# EAGLE board iupitter (EAGLE 7.7.0)
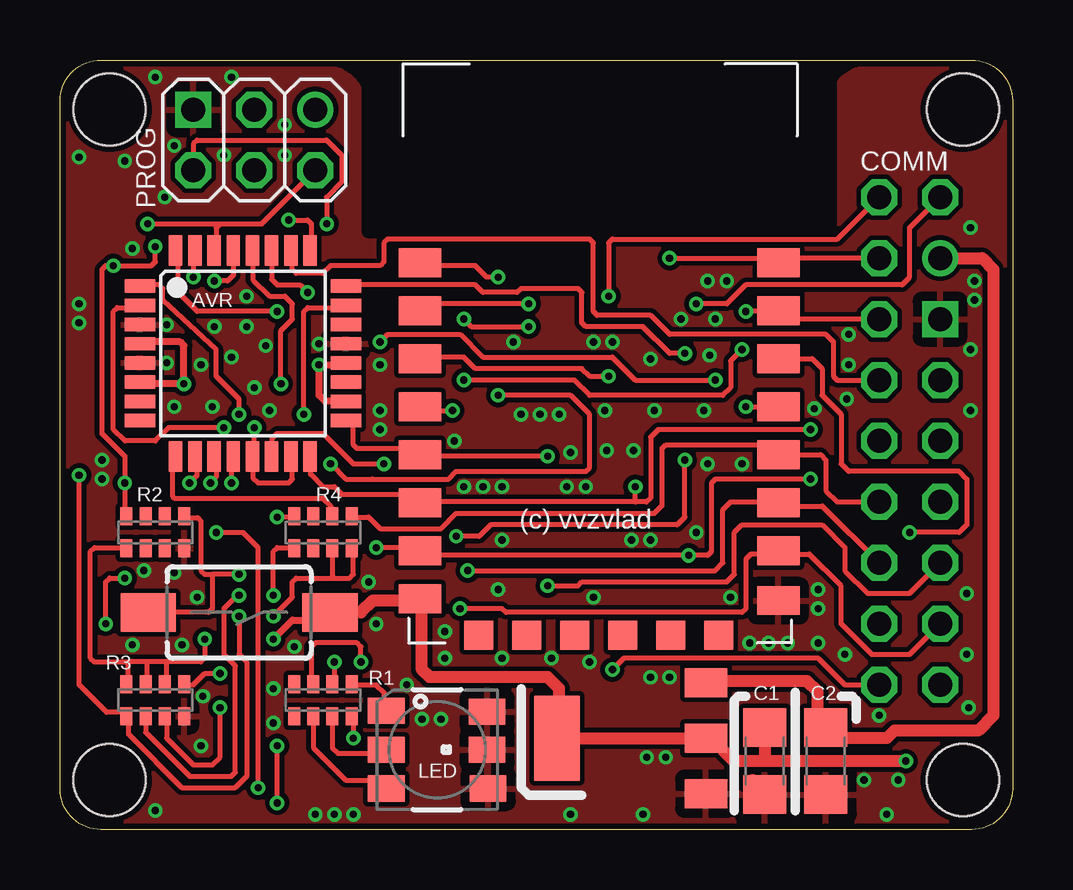
[diagram p0: board, top side]
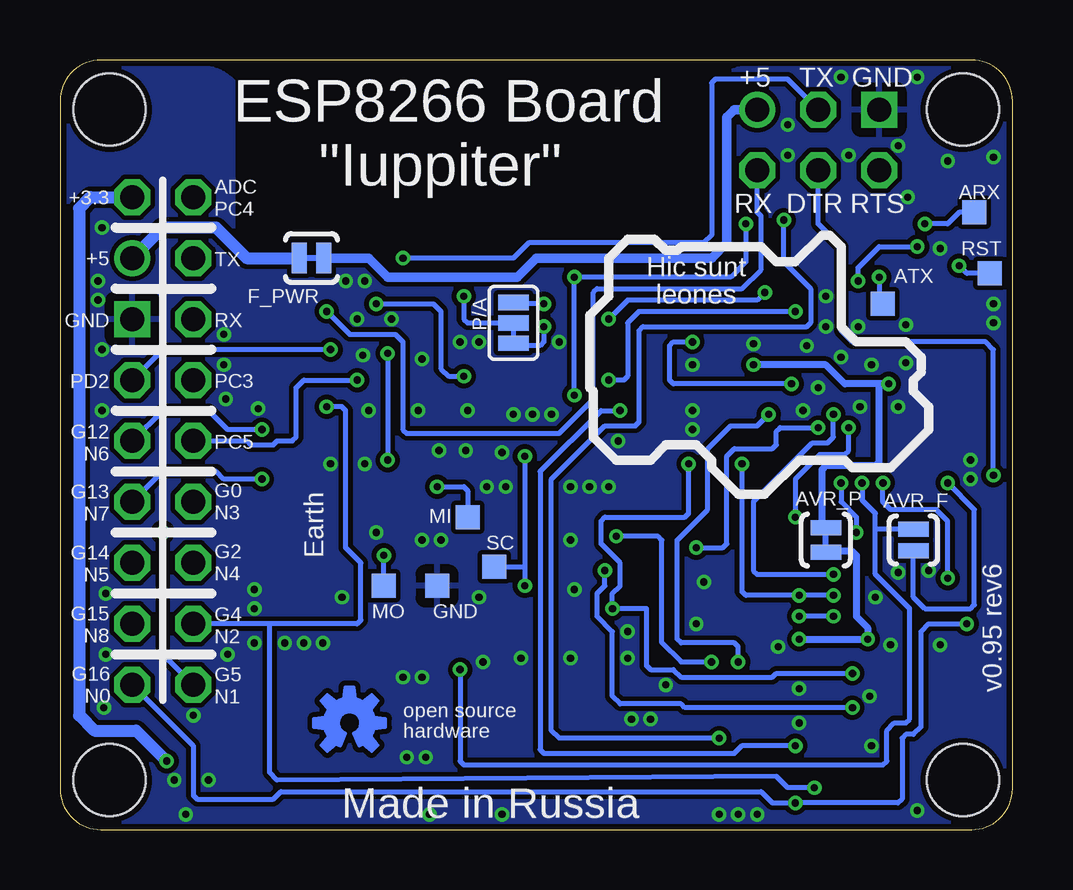
[diagram p1: board, bottom side, seen from below]

Size 39.69 x 32.07 mm. Coordinates in mm from the lower left corner, seen from the top.
Outline: 0,1.7 0,30.37 arc-90 1.7,32.07 37.99,32.07 arc-90 39.69,30.37 39.69,1.7 arc-90 37.99,0 1.7,0 arc-90 0,1.7
Copper layers (1*16): Top 0.035mm / dielectric 1.5mm / Bottom 0.035mm
Design rules "rezonit_35mm": minimum track width 0.2mm, minimum drill 0.3mm, track to track 0.2mm, track to pad 0.2mm, pad to pad 0.2mm, via to via 0.2mm, smd to smd 0.1mm, copper to edge 0.25mm, drill to drill 0.2mm, minimum pad ring 0.2mm, minimum via ring 0.15mm, stop-mask expansion 0.05mm, vias tented up to drill 0.7mm, thermal gap 0.4mm
Holes 3 mm at 2.06,2.06 37.62,2.06 2.06,30 37.62,30
tRestrict: area 12.9,24.9 to 32.1,31.8
bRestrict: area 12.9,24.9 to 32.2,31.8

## Footprints (pad centres in the part's own frame; a part is rotated, then mirrored left to right if it is on the bottom)
TP10SQ = smd 1 x 1: TP 0,0
TQFP32-08 = smd 1.27 x 0.559: 1 -4.293,2.8; 2 -4.293,2; 3 -4.293,1.2; 4 -4.293,0.4; 5 -4.293,-0.4; 6 -4.293,-1.2; 7 -4.293,-2; 8 -4.293,-2.8; 17 4.293,-2.8; 18 4.293,-2; 19 4.293,-1.2; 20 4.293,-0.4; 21 4.293,0.4; 22 4.293,1.2; 23 4.293,2; 24 4.293,2.8 | smd 0.559 x 1.27: 9 -2.8,-4.293; 10 -2,-4.293; 11 -1.2,-4.293; 12 -0.4,-4.293; 13 0.4,-4.293; 14 1.2,-4.293; 15 2,-4.293; 16 2.8,-4.293; 25 2.8,4.293; 26 2,4.293; 27 1.2,4.293; 28 0.4,4.293; 29 -0.4,4.293; 30 -1.2,4.293; 31 -2,4.293; 32 -2.8,4.293
PAD-JUMPER-2-NO_YES_SILK = smd 0.635 x 1.27: 1 -0.45,0; 2 0.45,0
PAD-JUMPER-2-NC_BY_TRACE_YES_SILK = smd 0.635 x 1.27: 1 -0.508,0; 2 0.508,0
TACTILE-SWITCH-1101NE = smd 2.3 x 1.6: 1 -3.785,0; 2 3.785,0
C1206 = smd 1.6 x 1.8: 1 -1.4,0; 2 1.4,0
COMM_V2_R(MAIN) = drill 1 octagon: 3V3 -10.16,1.27; A/PC4 -10.16,-1.27; G0N3 2.54,-1.27; G2N4 5.08,-1.27; G4N2 7.62,-1.27; G5N1 10.16,-1.27; G12N6 0,1.27; G13N7 2.54,1.27; G14N5 5.08,1.27; G15N8 7.62,1.27; G16N0 10.16,1.27; PC3 -2.54,-1.27; PC5 0,-1.27; PD2 -2.54,1.27; RX -5.08,-1.27; TX -7.62,-1.27 | drill 1: 5V -7.62,1.27 | drill 1 square: GND -5.08,1.27
SOT223 = smd 1.219 x 1.778: 1 -2.311,-3.099; 2 0,-3.099; 3 2.311,-3.099 | smd 3.556 x 1.905: 4 0,3.099
LED-TRICOLOR-5050 = smd 1.524 x 1.092: 1 -2.122,1.621; 2 -2.122,0; 3 -2.122,-1.621; 4 2.122,-1.621; 5 2.083,0; 6 2.083,1.581
ESP8266-ESP12E = smd 1.778 x 1.194: 1 0.556,16; 2 0.556,14; 3 0.556,12; 4 0.556,10; 5 0.556,8; 6 0.556,6; 7 0.556,4; 8 0.556,2; 15 15.486,1.921; 16 15.486,4; 17 15.486,6; 18 15.486,8; 19 15.486,10; 20 15.486,12; 21 15.486,14; 22 15.486,16 | smd 1.2 x 1.2: 9 3,0.476; 10 5,0.476; 11 7,0.476; 12 9,0.476; 13 11,0.476; 14 13,0.476
PAD-JUMPER-3-2OF3_NC_BY_TRACE_YES_SILK_FULL_BOX = smd 0.635 x 1.27: 1 -0.852,0; 2 0,0; 3 0.852,0
FLASH = drill 1: +5 -2.54,-1.27 | drill 1 octagon: DTR 0,1.27; RTS 2.54,1.27; RX -2.54,1.27; TX 0,-1.27 | drill 1 square: GND 2.54,-1.27
0603-ARV = smd 0.5 x 0.75: 1 -1.2,-0.665; 2 -0.4,-0.665; 3 0.4,-0.665; 4 1.2,-0.665; 5 1.2,0.665; 6 0.4,0.665; 7 -0.4,0.665; 8 -1.2,0.665

## Placement (x,y rotation side)
ARX  TPTP10SQ  [TP10SQ]  1.59,25.72 0 bottom
ATX  TPTP10SQ  [TP10SQ]  5.4,21.91 0 bottom
AVR  MEGA8-AI  [TQFP32-08]  7.62,19.84 0 top
AVR_F  JUMPER-PAD-2-NOYES_SILK  [PAD-JUMPER-2-NO_YES_SILK]  4.13,12.06 90 bottom
AVR_P  JUMPER-PAD-2-NC_BY_TRACE  [PAD-JUMPER-2-NC_BY_TRACE_YES_SILK]  7.78,12.06 90 bottom
BUTTON  IT-1181A  [TACTILE-SWITCH-1101NE]  7.46,9.05 180 top
C1  0.1uF  [C1206]  29.37,2.86 270 top
C2  0.1uF  [C1206]  31.91,2.86 270 top
COMM  [COMM_V2_R(MAIN)]  35.4,16.19 270 top
F_PWR  JUMPER-PAD-2-NC_BY_TRACE  [PAD-JUMPER-2-NC_BY_TRACE_YES_SILK]  29.21,23.81 180 bottom
GND  TPTP10SQ  [TP10SQ]  23.97,10.16 0 bottom
IC1  LD1117  [SOT223]  23.81,3.81 90 top
LED  LED-TRICOLOR-5050NO_IC  [LED-TRICOLOR-5050]  15.72,3.33 0 top
LOGO1  OSHW-LOGOS-COPPER  [OSHW-LOGO-S_COPPER]  27.62,4.45 0 bottom
MDL1  [ESP8266-ESP12E]  14.45,7.62 0 top
MI  TPTP10SQ  [TP10SQ]  22.7,13.02 0 bottom
MO  TPTP10SQ  [TP10SQ]  26.19,10.16 0 bottom
P/A  JUMPER-PAD-3-2OF3_NC_BY_TRACE_SMALL  [PAD-JUMPER-3-2OF3_NC_BY_TRACE_YES_SILK_FULL_BOX]  20.8,21.11 270 bottom
PROG  [FLASH]  8.1,28.73 180 top
R1  300R  [0603-ARV]  10.95,5.4 0 top
R2  10k  [0603-ARV]  3.97,12.38 180 top
R3  10k  [0603-ARV]  3.97,5.4 0 top
R4  300R  [0603-ARV]  10.95,12.38 180 top
RST  TPTP10SQ  [TP10SQ]  0.95,23.18 180 bottom
SC  TPTP10SQ  [TP10SQ]  21.59,10.95 0 bottom

## Library data of the parts
ARX ATX GND MI MO RST SC = testpad_new
AVR = atmel; MPN: ATMEGA8-16AU; OC_FARNELL: 9171371; OC_NEWARK: 73M8863
AVR_F AVR_P F_PWR P/A = SparkFun-Passives
BUTTON = SparkFun-Electromechanical; PROD_ID: SWCH-00815
C1 C2 = rcl
COMM MDL1 PROG = ESP12
IC1 = voltagereg
LED = SparkFun-LED; PROD_ID: DIO-10298
LOGO1 = SparkFun-Aesthetics
R1-R4 = SparkFun-Resistors

## Nets
+3V3: AVR_P.1 BUTTON.1 C1.1 COMM.3V3 IC1.2 IC1.4 MDL1.3 MDL1.8 R2.5 R3.6 R3.7 R3.8
+5V: C2.1 COMM.5V F_PWR.2 IC1.3
ADC: MDL1.2 P/A.1
AVR+3V3: AVR.4 AVR.6 AVR.18 AVR.20 AVR_P.2
AVR_RESET: AVR.29 AVR_F.1 R2.4 RST.TP
AVR_TX: ATX.TP AVR.31
BLUE_LED: LED.1 R1.5
ESP_FLASH: PROG.DTR R3.1 R4.7 R4.8
ESP_RESET: MDL1.1 PROG.RTS R3.2 R4.5
ESP_RX: ARX.TP AVR.30 COMM.RX MDL1.21 PROG.RX
ESP_TX: COMM.TX MDL1.22 PROG.TX
F+5V: F_PWR.1 PROG.+5
G0: COMM.G0N3 MDL1.18 R4.1
G2: COMM.G2N4 MDL1.17 R3.3
G4: AVR.12 COMM.G4N2 MDL1.19
G5: AVR.11 AVR_F.2 COMM.G5N1 MDL1.20
G12: AVR.16 COMM.G12N6 MDL1.6 MI.TP
G13/ARX: AVR.13 AVR.15 COMM.G13N7 MDL1.7 MO.TP
G14: AVR.17 COMM.G14N5 MDL1.5 SC.TP
G15/ATX: AVR.14 COMM.G15N8 MDL1.16 R3.5
G16: AVR.10 COMM.G16N0 MDL1.4
GND: AVR.3 AVR.5 AVR.21 C1.2 C2.2 COMM.GND GND.TP IC1.1 LED.4 LED.5 LED.6 MDL1.15 PROG.GND R2.8 R3.4
GREEN_LED: LED.3 R1.2
LED_PC0: AVR.23 R1.6
LED_PC1: AVR.24 R1.7
LED_PC2: AVR.25 R1.4
N$1: COMM.A/PC4 P/A.2
PC3: AVR.26 COMM.PC3
PC4: AVR.27 P/A.3
PC5: AVR.28 COMM.PC5
PD2: AVR.32 COMM.PD2
PD3: AVR.1 BUTTON.2 R2.1
PD4: AVR.2 R4.4
PD5: AVR.9 R4.2
RED_LED: LED.2 R1.3

## Tracks (layer width: path | path; a pad name or v marks a point on that pad's centre or on a via)
+3V3  (via drill 0.3 pad 0.6)
  Top 0.2: MDL1.3 15.07,19.69 16.83,19.69 17.3,19.21 21.75,19.21 22.07,18.89 v22.86,18.89 | 3.49,6.14 R3.7 3.62,6.06 3.64,6.08 3.64,6.98 3.65,6.99 | 4.29,6.14 4.35,6.08 | R2.5 2.74,11.75 1.43,11.75 1.27,11.59 1.27,7.14 1.43,6.99 2.86,6.99 | 4.45,6.99 3.65,6.99 | 3.65,6.99 2.86,6.99 | 2.86,6.99 2.84,6.97 2.84,6.08 2.82,6.06 R3.8 | 4.24,6.08 4.35,6.08 | 4.35,6.08 4.39,6.08 | 4.39,6.08 4.4,6.08 4.45,6.03 4.45,6.99 | 4.35,6.08 R3.6 4.39,6.08 | BUTTON.1 10.64,9.05 10.32,8.73 | v6.03,7.94 6.03,7.14 5.87,6.99 4.45,6.99 | v26.51,21.91 27.78,21.91 28.58,22.7 35.08,22.7 35.4,23.02 35.4,25.08 COMM.3V3 | 15.08,9.54 MDL1.8
  Top 0.3: v8.89,7.94 9.68,8.73 10.32,8.73
  Top 0.5: v35.24,2.86 29.37,2.86 | 29.37,2.86 28.1,2.86 27.15,3.81 IC1.2 IC1.4 20.8,3.89 20.8,5.87 20.32,6.35 15.4,6.35 15.08,6.67 15.08,9.54 13.03,9.54 12.54,9.05 BUTTON.1 | C1.1 29.37,2.86
  Bottom 0.2: v26.51,21.91 24.13,21.91 23.81,21.59 23.81,19.21 23.5,18.89 v22.86,18.89 | 7.75,11.59 AVR_P.1
  Bottom 0.3: v8.89,7.94 v6.03,7.94 6.03,8.41 6.51,8.89 6.51,11.43 6.67,11.59 7.75,11.59
  Bottom 0.5: COMM.3V3 38.42,26.35 38.89,25.88 38.89,4.76 38.26,4.13 36.51,4.13 v35.24,2.86
+5V
  Top 0.2: 31.56,4.6 C2.1 | 26.51,6.35 26.35,6.35
  Top 0.5: COMM.5V 38.42,23.81 38.89,23.34 38.89,4.76 38.26,4.13 34.77,4.13 34.45,3.81 32.2,3.81 C2.1 | 31.56,4.6 31.56,5.74 31.12,6.19 26.98,6.19 IC1.3 26.74,6.12 26.51,6.35
  Bottom 0.5: F_PWR.2 31.91,23.81 33.18,25.08 35.4,25.08 COMM.5V
ADC  (via drill 0.3 pad 0.6)
  Top 0.2: 15.03,21.59 MDL1.2 15.29,21.91 v19.53,21.91
  Bottom 0.2: 20.78,21.75 P/A.1 20.78,21.91 v19.53,21.91
AVR+3V3  (via drill 0.3 pad 0.6)
  Top 0.2: 3.4,20.32 AVR.4 | 11.83,19.53 AVR.20 11.84,19.37 | 3.4,18.57 AVR.6
  Top 0.3: 3.4,20.32 5,20.32 5.16,20.16 v5.16,18.57 3.4,18.57 | AVR.18 11.05,17.84 10.8,18.1 v10.8,19.37 11.84,19.37
  Bottom 0.3: v5.16,18.57 5.56,18.57 | 5.56,18.57 6.99,18.57 7.78,19.37 v10.8,19.37 | AVR_P.2 7.81,12.57 7.94,12.7 7.94,15 7.78,15.16 5.72,15.16 5.56,15.32 5.56,18.57
AVR_RESET  (via drill 0.3 pad 0.6)
  Top 0.2: R2.4 2.7,13.12 v2.7,14.45 2.7,15.56 1.75,16.51 1.75,23.34 1.91,23.49 v2.22,23.49 3.81,23.49 3.97,23.65 v3.97,24.29 | 7.04,24.08 7.26,24.08 7.3,24.13 | 7.3,24.13 7.3,24.05 7.22,23.97 7.22,23.1 6.99,22.86 v6.43,22.86 | AVR.29 7.3,24.14 7.3,24.13
  Bottom 0.2: v2.7,14.45 1.59,13.33 1.59,9.37 1.75,9.21 3.65,9.21 4.13,9.68 AVR_F.1 | v6.43,22.86 6.43,23.42 5.56,24.29 v3.97,24.29 | RST.TP 1.91,23.18 v2.22,23.49
AVR_TX  (via drill 0.3 pad 0.6)
  Top 0.2: AVR.31 5.62,24.03 5.56,23.97 v5.56,23.02
  Bottom 0.2: v5.56,23.02 5.56,22.23 ATX.TP
BLUE_LED
  Top 0.2: LED.1 13.49,5.05 13.49,5.71 13.19,6.02 12.19,6.02 R1.5
ESP_FLASH  (via drill 0.3 pad 0.6)
  Top 0.2: v7.46,8.89 7.46,7.3 7.78,6.99 7.78,2.22 7.3,1.75 5.08,1.75 2.86,3.97 2.86,4.64 R3.1 2.77,4.75 2.64,4.88 1.94,4.88 0.79,6.03 v0.79,14.76 | v8.89,8.89 9.68,9.68 9.68,10.32 9.84,10.48 11.43,10.48 | 11.43,10.48 12.07,10.48 12.22,10.64 12.22,11.33 R4.8 | R4.7 11.35,10.55 11.43,10.48
  Bottom 0.2: v7.46,8.89 v8.89,8.89 | v0.79,14.76 0.79,20 1.11,20.32 6.67,20.32 7.14,20.8 7.14,24.29 8.1,25.24 PROG.DTR
ESP_RESET  (via drill 0.3 pad 0.6)
  Top 0.2: R3.2 3.57,4.05 5.4,2.22 7.14,2.22 7.3,2.38 7.3,6.83 6.83,7.3 6.83,9.21 7.38,9.76 v7.46,9.76 | v18.26,18.1 21.27,18.1 22.07,17.3 22.07,15.08 21.91,14.92 16.51,14.92 16.19,14.61 13.02,14.61 13.02,14.6 11.91,14.6 v11.27,15.24 | v8.89,9.76 8.89,11.59 9.05,11.75 9.62,11.75 R4.5 | v11.11,25.24 11.11,26.35 11.75,26.99 11.75,28.1 11.11,28.73 5.72,28.73 5.56,28.57 PROG.RTS | v18.26,23.02 17.78,23.02 17.3,23.49 15.13,23.49 MDL1.1
  Bottom 0.2: v7.46,9.76 v8.89,9.76 11.11,9.76 11.27,9.92 v11.27,15.24 | v11.11,25.24 11.11,23.65 11.75,23.02 18.1,23.02 | v18.26,18.1 18.26,22.86 18.1,23.02 | 18.1,23.02 v18.26,23.02
ESP_RX  (via drill 0.3 pad 0.6)
  Top 0.2: 29.96,21.59 MDL1.21 | 29.69,21.27 29.59,21.68 29.44,21.68 29.22,21.91 29.37,21.91 29.69,21.59 | 6.67,25.24 6.51,25.08 6.51,24.23 | 6.51,24.23 AVR.30 | 29.69,21.59 v28.58,21.59 | 6.44,24.28 6.44,24.22 | 6.44,24.22 6.35,24.13 | 6.51,24.23 6.45,24.23 6.44,24.22 | MDL1.21 29.72,21.62 29.69,21.59 | 6.67,25.24 8.41,25.24 PROG.RX | COMM.RX 30.28,21.27 MDL1.21 | v3.65,25.24 6.67,25.24
  Bottom 0.2: PROG.RX 10.64,25.72 10.48,25.56 10.48,23.34 11.27,22.54 17.3,22.54 17.46,22.38 17.46,17.94 18.89,16.51 25.24,16.51 25.4,16.67 25.4,20.32 25.72,20.64 27.62,20.64 v28.58,21.59 | ARX.TP 2.22,25.72 2.7,25.24 v3.65,25.24
ESP_TX  (via drill 0.3 pad 0.6)
  Top 0.2: 30.16,23.65 30.16,23.97 30.04,23.85 30.04,23.48 29.93,23.59 MDL1.22 | v25.4,23.81 29.74,23.81 MDL1.22 | COMM.TX 30.12,23.81 MDL1.22
  Bottom 0.2: PROG.TX 9.37,31.27 12.38,31.27 12.54,31.12 12.54,24.76 12.86,24.45 20.16,24.45 20.8,23.81 v25.4,23.81
F+5V
  Bottom 0.4: PROG.+5 11.59,30 11.91,29.69 11.91,24.45 12.54,23.81 19.84,23.81 20.64,23.02 26.04,23.02 26.83,23.81 F_PWR.1
G0
  Top 0.2: R4.1 12.19,12.89 12.22,13.02 12.86,13.02 13.34,12.54 15.88,12.54 16.51,13.18 24.77,13.18 25.08,13.49 25.08,15.87 25.24,16.03 29.87,16.03 MDL1.18 30.42,15.62 | 30.64,15.48 30.56,15.48 30.42,15.62 | 30.42,15.62 31.69,15.62 31.91,15.4 31.91,14.13 32.39,13.65 COMM.G0N3
G2  (via drill 0.3 pad 0.6)
  Top 0.2: v16.99,10.8 27.31,10.8 27.62,11.11 27.62,13.33 27.94,13.65 29.9,13.65 MDL1.17 30.04,13.51 30.04,13.48 31.76,13.48 COMM.G2N4 | v6.67,5.08 6.67,3.02 6.35,2.7 5.56,2.7 4.44,3.81 4.44,4.68 4.39,4.73 R3.3
  Bottom 0.2: v16.99,10.8 16.99,10.16 17.3,9.84 17.3,8.89 16.67,8.25 16.67,5.56 16.35,5.24 13.81,5.24 13.65,5.08 v6.67,5.08
G4  (via drill 0.3 pad 0.6)
  Top 0.2: 7.04,15.68 7.04,15.66 7.14,15.56 | 7.14,15.56 v7.14,14.45 | v28.58,17.62 MDL1.19 | v8.26,1.75 8.26,11.75 7.62,12.38 v6.51,12.38 | AVR.12 7.15,15.55 7.14,15.56
  Bottom 0.2: 30.96,8.57 30.96,2.38 30.64,2.06 9.84,2.22 9.37,1.75 v8.26,1.75 | v28.58,17.62 27.94,17.62 27.78,17.46 27.78,11.75 27.15,11.11 27.15,8.73 27.31,8.57 30.96,8.57 | v7.14,14.45 7.14,13.65 6.51,13.02 v6.51,12.38 | 30.96,8.57 COMM.G4N2
G5  (via drill 0.3 pad 0.6)
  Top 0.2: MDL1.20 31.34,19.62 31.75,19.21 31.75,18.1 32.54,17.3 32.54,15.24 32.86,14.92 37.47,14.92 37.78,14.6 37.78,12.7 37.47,12.38 v35.4,12.38 | v23.02,6.67 23.5,7.14 31.59,7.14 32.7,6.03 COMM.G5N1 | v6.27,14.45 6.51,14.68 6.51,15.08 6.44,15.15 6.44,15.48 6.42,15.5 AVR.11
  Bottom 0.2: v23.02,6.67 23.02,2.86 22.86,2.7 5.4,2.7 5.24,2.86 5.24,4.13 4.92,4.45 4.45,4.45 4.29,4.6 4.29,9.21 5.72,10.64 5.72,12.54 | 5.72,12.54 5.72,13.18 6.27,13.73 v6.27,14.45 | AVR_F.2 5.69,12.51 5.72,12.54 | v35.4,12.38 35.4,7.3 COMM.G5N1
G12  (via drill 0.3 pad 0.6)
  Top 0.2: v31.27,16.67 24.92,16.67 24.61,16.35 24.61,13.81 24.45,13.65 23.97,13.65 | 23.97,13.65 15.13,13.65 MDL1.6 14.81,13.97 11.75,13.97 11.43,14.29 10.95,14.29 10.44,14.8 10.44,15.53 AVR.16 | 23.97,13.65 v23.97,14.29
  Bottom 0.2: v23.97,14.29 22.86,14.29 22.7,14.13 MI.TP | v31.27,16.67 32.7,16.67 33.5,17.46 35.4,17.46 COMM.G12N6
G13/ARX  (via drill 0.3 pad 0.6)
  Top 0.2: AVR.15 9.68,15.49 9.68,14.6 9.53,14.45 8.26,14.45 8.04,14.66 8.04,15.53 AVR.13 7.97,15.55 7.84,15.68 7.97,15.68 8.1,15.56 v8.1,16.75 | 14.84,11.68 15.02,11.68 15.08,11.75 | 15.08,11.75 v13.18,11.75 | v31.27,14.6 27.31,14.6 27.15,14.45 27.15,11.59 26.99,11.43 v26.19,11.43 15.56,11.43 15.4,11.59 15.56,11.59 15.24,11.75 15.13,11.75 | 15.13,11.75 MDL1.7 | 15.13,11.75 15.08,11.75
  Bottom 0.2: v8.1,16.75 9.68,16.75 9.84,16.59 9.84,16.03 10,15.87 11.59,15.87 11.91,15.56 11.91,11.91 12.07,11.75 v13.18,11.75 | MO.TP v26.19,11.43 | v31.27,14.6 32.86,14.6 33.18,14.92 35.4,14.92 COMM.G13N7
G14  (via drill 0.3 pad 0.6)
  Top 0.2: v20.32,10.16 21.59,10.16 21.75,10.32 27.78,10.32 28.1,10.64 28.1,12.38 28.42,12.7 31.75,12.7 32.7,11.75 32.7,10.8 33.66,9.84 35.4,9.84 COMM.G14N5 | 14.84,15.68 14.89,15.68 14.92,15.72 | 14.92,15.72 15.08,15.87 12.38,15.87 12.22,16.03 12.22,16.83 12.07,16.99 11.97,16.99 AVR.17 | v20.32,15.56 15.06,15.56 MDL1.5 15,15.64 14.92,15.72
  Bottom 0.2: v20.32,15.56 20.32,10.95 | 20.32,10.95 v20.32,10.16 | SC.TP 20.32,10.95
G15/ATX  (via drill 0.3 pad 0.6)
  Top 0.2: v16.67,9.21 18.42,9.21 18.57,9.05 28.42,9.05 28.58,9.21 28.58,11.27 28.79,11.48 29.84,11.48 29.84,11.53 MDL1.16 30.04,11.51 30.04,11.48 31.22,11.48 32.54,10.16 32.54,8.57 33.81,7.3 35.4,7.3 COMM.G15N8 | v13.49,15.24 12.22,15.24 10.95,16.51 9.05,16.51 8.84,16.3 8.84,15.57 AVR.14 | R3.5 5.2,6.04 5.56,6.04 6.03,6.51 v6.67,6.51
  Bottom 0.2: v13.49,15.24 13.49,13.18 13.65,13.02 16.99,13.02 17.15,12.86 17.15,11.91 16.35,11.11 16.35,10.16 16.67,9.84 v16.67,9.21 15.24,9.21 15.24,6.83 15.08,6.67 14.13,6.67 13.81,6.35 10,6.35 9.84,6.51 v6.67,6.51
G16  (via drill 0.3 pad 0.6)
  Top 0.2: v9.05,1.11 v9.05,3.49 | v16.35,17.46 15.4,17.46 15.24,17.62 MDL1.4 | v1.91,8.57 1.91,10.32 2.06,10.48 v2.7,10.48 | v5.4,14.45 5.72,14.76 5.72,15.24 | 5.56,15.61 AVR.10
  Top 0.3: 5.72,15.24 5.56,15.61
  Bottom 0.2: v16.35,17.46 17.15,17.46 19.69,14.92 19.69,3.33 19.53,3.18 11.59,3.18 11.27,3.49 v9.05,3.49 | v1.91,8.57 3.49,8.57 3.81,8.25 3.81,4.29 4.13,3.97 4.45,3.97 4.6,3.81 4.6,1.27 4.76,1.11 v9.05,1.11 10,1.11 10.48,1.59 30.48,1.59 30.8,1.27 33.97,1.27 34.13,1.43 34.13,3.49 COMM.G16N0 | v2.7,10.48 2.7,12.86 3.18,13.33 5.08,13.33 5.4,13.65 v5.4,14.45
GND  (via drill 0.3 pad 0.6)
  Top 0.5: 28.86,2.06 C1.2
  other vias: 24.45,3.02 33.5,2.06 34.93,2.06 29.53,7.78 21.91,14.29 4.44,21.03 20.48,7.14 24.61,6.35 3.02,7.7 9.76,7.62 5.71,9.68 10.79,20.24 12.86,10.32 5.08,7.7 5.87,3.49 20,17.3 4.44,19.45 6.35,17.62 22.22,9.68 16.83,14.29 21.27,15.72 16.43,16.19 19.21,17.3 5.87,19.37 4.76,17.62 6.43,20.96 7.14,19.69 8.73,17.46 34.45,0.64 24.29,0.64 32.86,19.37 38.1,22.86 21.27,0.64 22.7,17.46 32.78,17.94 13.18,8.57 8.57,20.16 13.34,16.67 15.08,4.6 10.64,0.64 18.26,10 18.41,12.06 15.88,4.6 0.79,28.02 2.7,27.86 4.37,26.35 13.34,19.37 7.14,31.35 3.97,31.35 1.75,15.4 18.41,7.14 16.03,7.14 23.02,20.32 22.78,15.8 27.07,19.76 24.61,19.61 37.86,5.08 38.1,22.07 37.94,20 24.76,17.46 26.83,17.46 26.51,12.38 26.99,15.24 28.42,15.24 23.81,12.06 27.94,9.68 30.32,7.78 31.59,7.78 31.59,9.21 28.73,7.78 25.88,21.27 37.94,17.46 8.89,5.87 5.95,5.56 8.89,4.45 13.34,17.46 8.1,18.42 7.78,20.96 17.62,14.29 21.11,14.29 23.89,15.8 20.8,17.3 22.22,20.32 27.3,21.27 26.99,22.86 37.94,25.08 27.78,22.86 6.83,28.1 3.02,24.21 14.45,6.03 22.07,6.99 18.89,20.32 34.13,4.76 31.59,10 16.03,8.25 4.76,28.5 11.43,0.64 12.22,0.64 32.7,7.3 37.78,7.3 37.78,9.84 32.86,20.64 3.97,0.79 1.75,14.6 0.79,21.91 0.79,21.11 18.41,14.29 24.61,12.06 25.4,6.35 25.24,3.02 4.76,10.72 3.49,10.79 7.78,22.23 9.37,28.1 9.37,29.37 31.43,17.54
  pour Bottom (isolate 0.2, rank 3): 30.37,24.92 14.4,24.92 arc-90 12.7,26.62 12.7,30.05 arc90 11,31.75 2.02,31.75 arc90 0.32,30.05 0.32,2.02 arc90 2.02,0.32 37.67,0.32 arc90 39.37,2.02 39.37,30.05 arc90 37.67,31.75 33.77,31.75 arc90 32.07,30.05 32.07,26.62 arc-90
  pour Top (isolate 0.2, rank 3): 30.37,24.92 14.4,24.92 arc-90 12.7,26.62 12.7,30.05 arc90 11,31.75 2.02,31.75 arc90 0.32,30.05 0.32,2.02 arc90 2.02,0.32 37.67,0.32 arc90 39.37,2.02 39.37,30.05 arc90 37.67,31.75 33.77,31.75 arc90 32.07,30.05 32.07,26.62 arc-90
GREEN_LED
  Top 0.2: 13.47,1.59 LED.3 13.24,2.06 11.91,2.06 10.55,3.42 R1.2
LED_PC0  (via drill 0.3 pad 0.6)
  Top 0.2: v10.16,17.3 10.17,21.6 10.32,21.75 11.85,21.75 AVR.23 | v11.43,6.99 11.43,6.14 R1.6
  Bottom 0.2: v11.43,6.99 11.43,7.62 11.59,7.78 13.81,7.78 13.97,7.94 13.97,12.07 12.7,13.33 12.7,15.87 11.75,16.83 10.64,16.83 v10.16,17.3
LED_PC1  (via drill 0.3 pad 0.6)
  Top 0.2: v26.04,19.84 25.4,19.84 24.29,20.96 21.91,20.96 21.75,21.11 21.75,22.38 21.59,22.54 19.21,22.54 19.05,22.38 17.62,22.38 17.3,22.7 11.97,22.7 AVR.24 | v16.51,12.22 17.46,12.22 17.94,12.7 25.72,12.7 26.04,13.02 v26.04,15.4 | v12.54,6.99 12.54,7.62 12.38,7.78 10.64,7.78 10.48,7.62 10.48,6.14 R1.7
  Bottom 0.2: v26.04,19.84 v26.04,15.4 | v16.51,12.22 14.76,12.22 14.61,12.07 14.61,7.78 13.81,6.99 v12.54,6.99
LED_PC2  (via drill 0.3 pad 0.6)
  Top 0.2: 12.24,4.68 12.24,4.74 12.22,4.76 | 12.22,4.76 v12.22,3.81 | v9.53,25.4 10.32,25.4 10.48,25.24 10.48,24.19 AVR.25 | R1.4 12.19,4.73 12.22,4.76
  Bottom 0.2: v12.22,3.81 18.89,3.81 19.21,4.13 19.21,14.6 16.99,16.83 15.72,16.83 15.56,16.99 15.56,20.8 15.4,20.96 8.57,20.96 8.41,21.11 8.41,22.54 9.53,23.65 v9.53,25.4
N$1  (via drill 0.3 pad 0.6)
  Top 0.2: COMM.A/PC4 32.39,24.61 23.02,24.61 22.86,24.45 v22.86,22.23
  Bottom 0.2: v22.86,22.23 22.86,21.27 22.7,21.11 P/A.2
PC3
  Top 0.2: AVR.26 9.68,24.07 9.68,23.34 9.84,23.18 10.95,23.18 11.27,23.49 13.34,23.49 13.49,23.65 13.49,24.45 13.65,24.61 22.07,24.61 22.23,24.45 22.23,21.59 22.38,21.43 24.61,21.43 25.4,20.64 31.91,20.64 32.23,20.32 32.23,18.89 32.39,18.73 COMM.PC3
PC4  (via drill 0.3 pad 0.6)
  Top 0.2: AVR.27 8.82,22.93 9.05,22.7 10,22.7 v10.32,22.38 | v16.83,21.27 17.15,20.96 v19.53,20.96
  Bottom 0.2: v19.53,20.96 19.53,20.32 19.69,20.16 20.78,20.16 P/A.3 | v10.32,22.38 10.64,22.07 16.03,22.07 v16.83,21.27
PC5  (via drill 0.3 pad 0.6)
  Top 0.2: v13.34,20.32 13.65,20.64 16.67,20.64 17.62,19.69 23.02,19.69 23.97,18.73 v27.31,18.73 | v9.21,18.57 9.21,20.8 9.68,21.27 9.68,21.91 9.37,22.23 8.73,22.23 8.04,22.92 8.04,24.08 8.02,24.1 AVR.28
  Bottom 0.2: v9.21,18.57 14.13,18.57 14.29,18.73 14.29,20.16 14.13,20.32 v13.34,20.32 | v27.31,18.73 29.53,18.73 29.85,18.42 29.85,16.35 30,16.19 30.64,16.19 30.8,16.03 31.75,16.03 31.91,16.19 COMM.PC5
PD2  (via drill 0.3 pad 0.6)
  Top 0.2: v28.42,20 27.94,19.53 27.94,18.42 27.62,18.1 22.07,18.1 21.43,18.73 v16.83,18.73 | v9.05,21.59 5.72,21.59 4.92,22.38 4.92,24.04 AVR.32
  Bottom 0.2: v9.05,21.59 15.56,21.59 16.03,21.11 16.03,18.89 16.19,18.73 v16.83,18.73 | v28.42,20 35.4,20 COMM.PD2
PD3  (via drill 0.3 pad 0.6)
  Top 0.2: 6.35,10.64 6.03,10.64 5.87,10.8 5.87,12.86 5.73,13 5.22,13 R2.1 | 6.35,10.64 6.35,9.21 6.19,9.05 BUTTON.2 | v7.46,10.64 6.35,10.64 | v7.46,17.3 7.46,17.94 6.51,18.89 6.51,20 4.29,22.07 4.29,22.54 4.13,22.7 3.39,22.7 AVR.1 3.39,22.64 3.49,22.54
  Bottom 0.2: v7.46,10.64 10.64,10.64 10.8,10.8 10.8,13.65 8.33,16.11 7.7,16.11 7.46,16.35 v7.46,17.3
PD4  (via drill 0.3 pad 0.6)
  Top 0.2: 9.64,12.88 9.64,13.06 9.68,13.02 | 9.68,13.02 v9.05,13.02 | 3.42,21.75 AVR.2 3.23,21.75 2.38,21.75 2.22,21.59 2.22,16.67 2.7,16.19 3.97,16.19 4.52,16.75 v6.83,16.75 | R4.4 9.71,13.05 9.68,13.02
  Bottom 0.2: v6.83,16.75 6.83,15.8 6.99,15.64 8.02,15.64 9.05,14.6 v9.05,13.02
PD5
  Top 0.2: R4.2 11.27,12.81 11.27,13.49 10.95,13.81 4.76,13.81 4.68,13.89 4.68,15.48 4.75,15.48 AVR.9
RED_LED
  Top 0.2: R1.3 11.35,3.41 11.59,3.18 13.44,3.18 LED.2

## Text on the board
tNames: (c) vvzvlad
bNames: ESP8266 Board / "Iuppiter" | Hic sunt / leones | Earth | v0.95 rev6 | open source / hardware | Made in Russia